# EAGLE board arduino boardv3 (EAGLE 6.1)
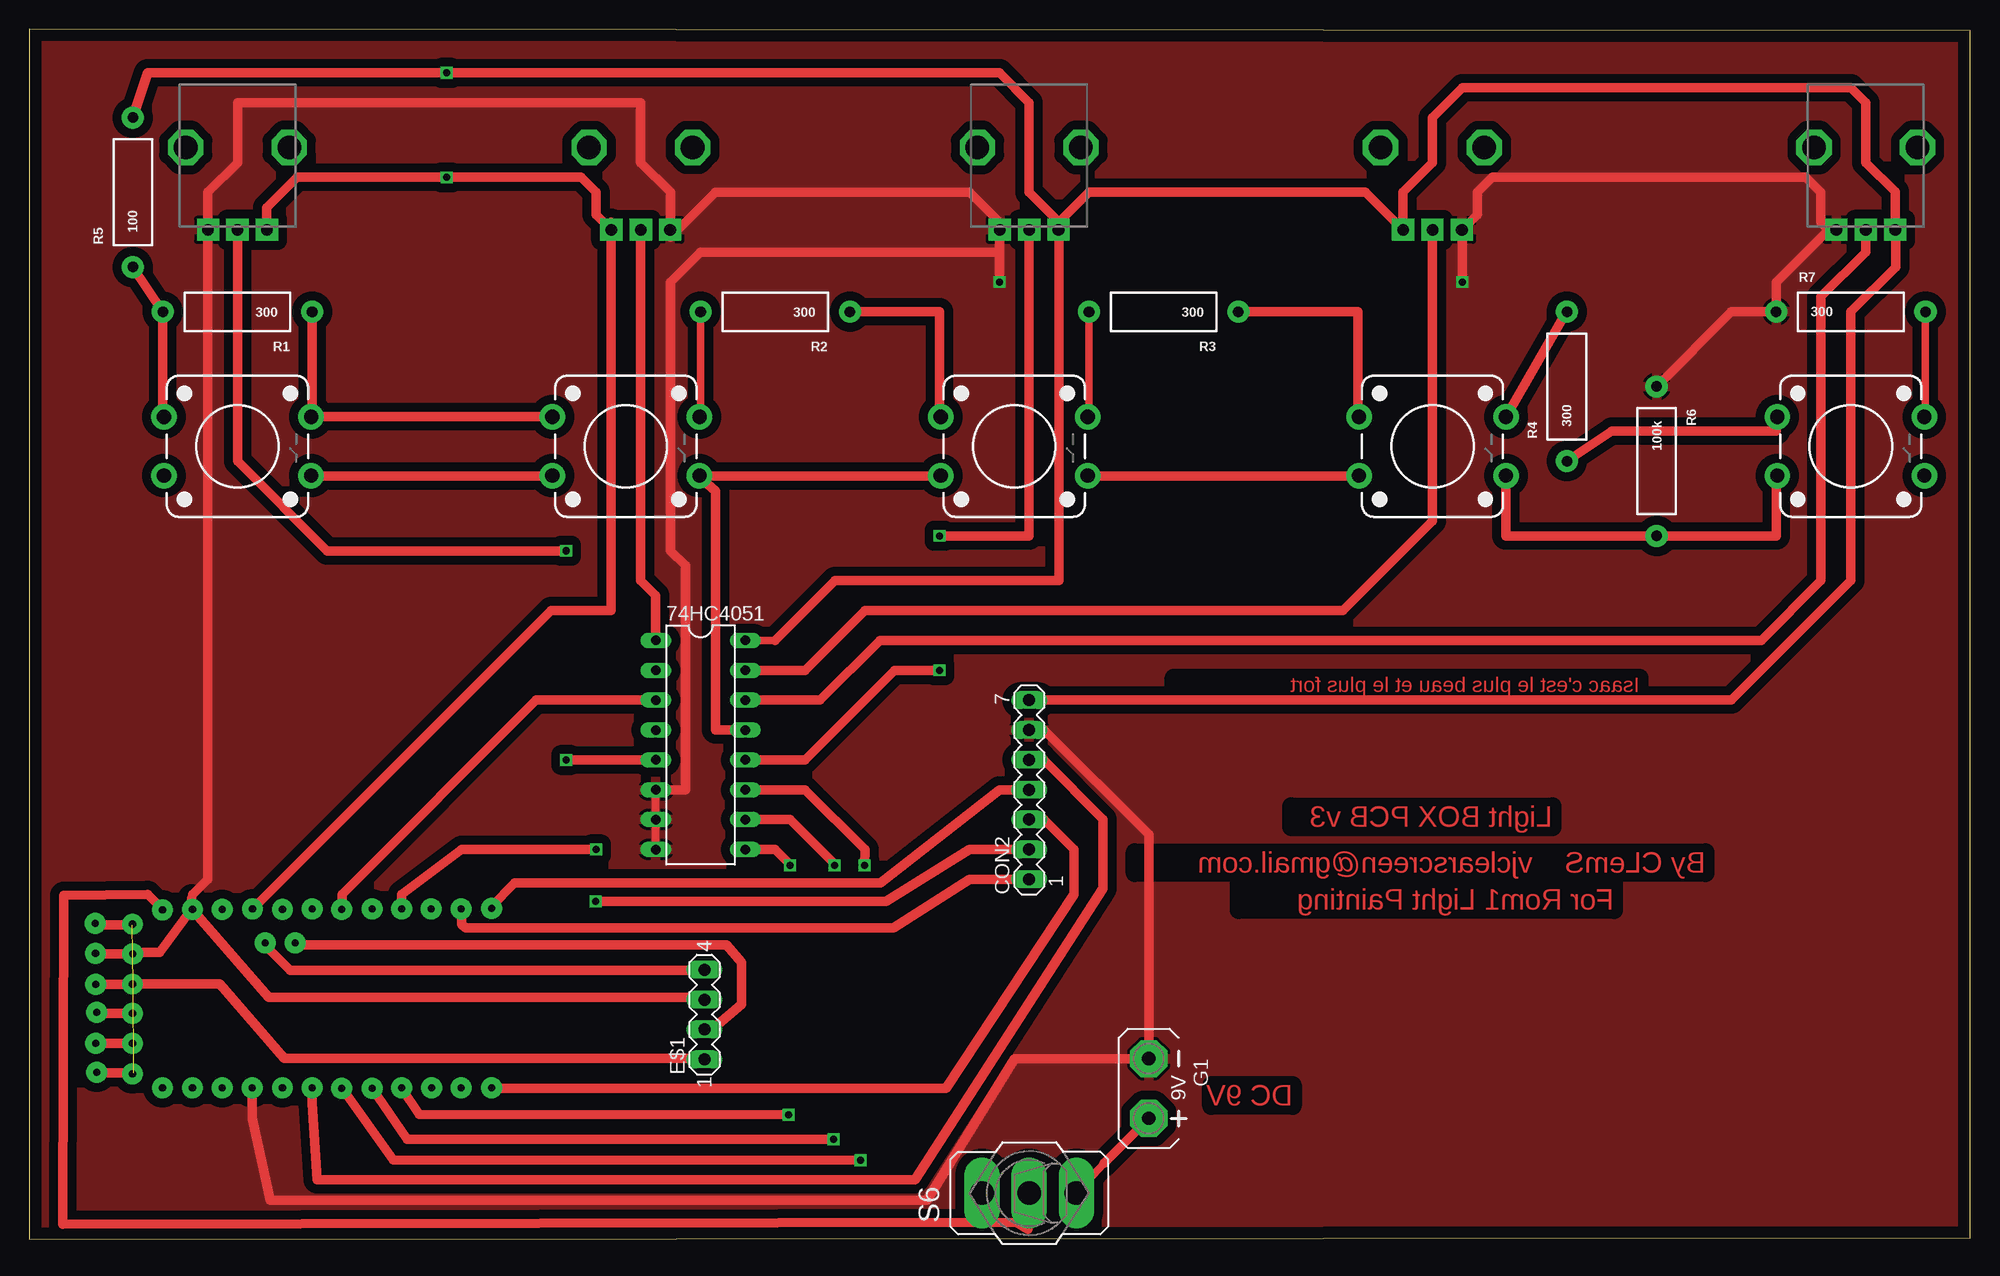
[diagram p0: board, top side]
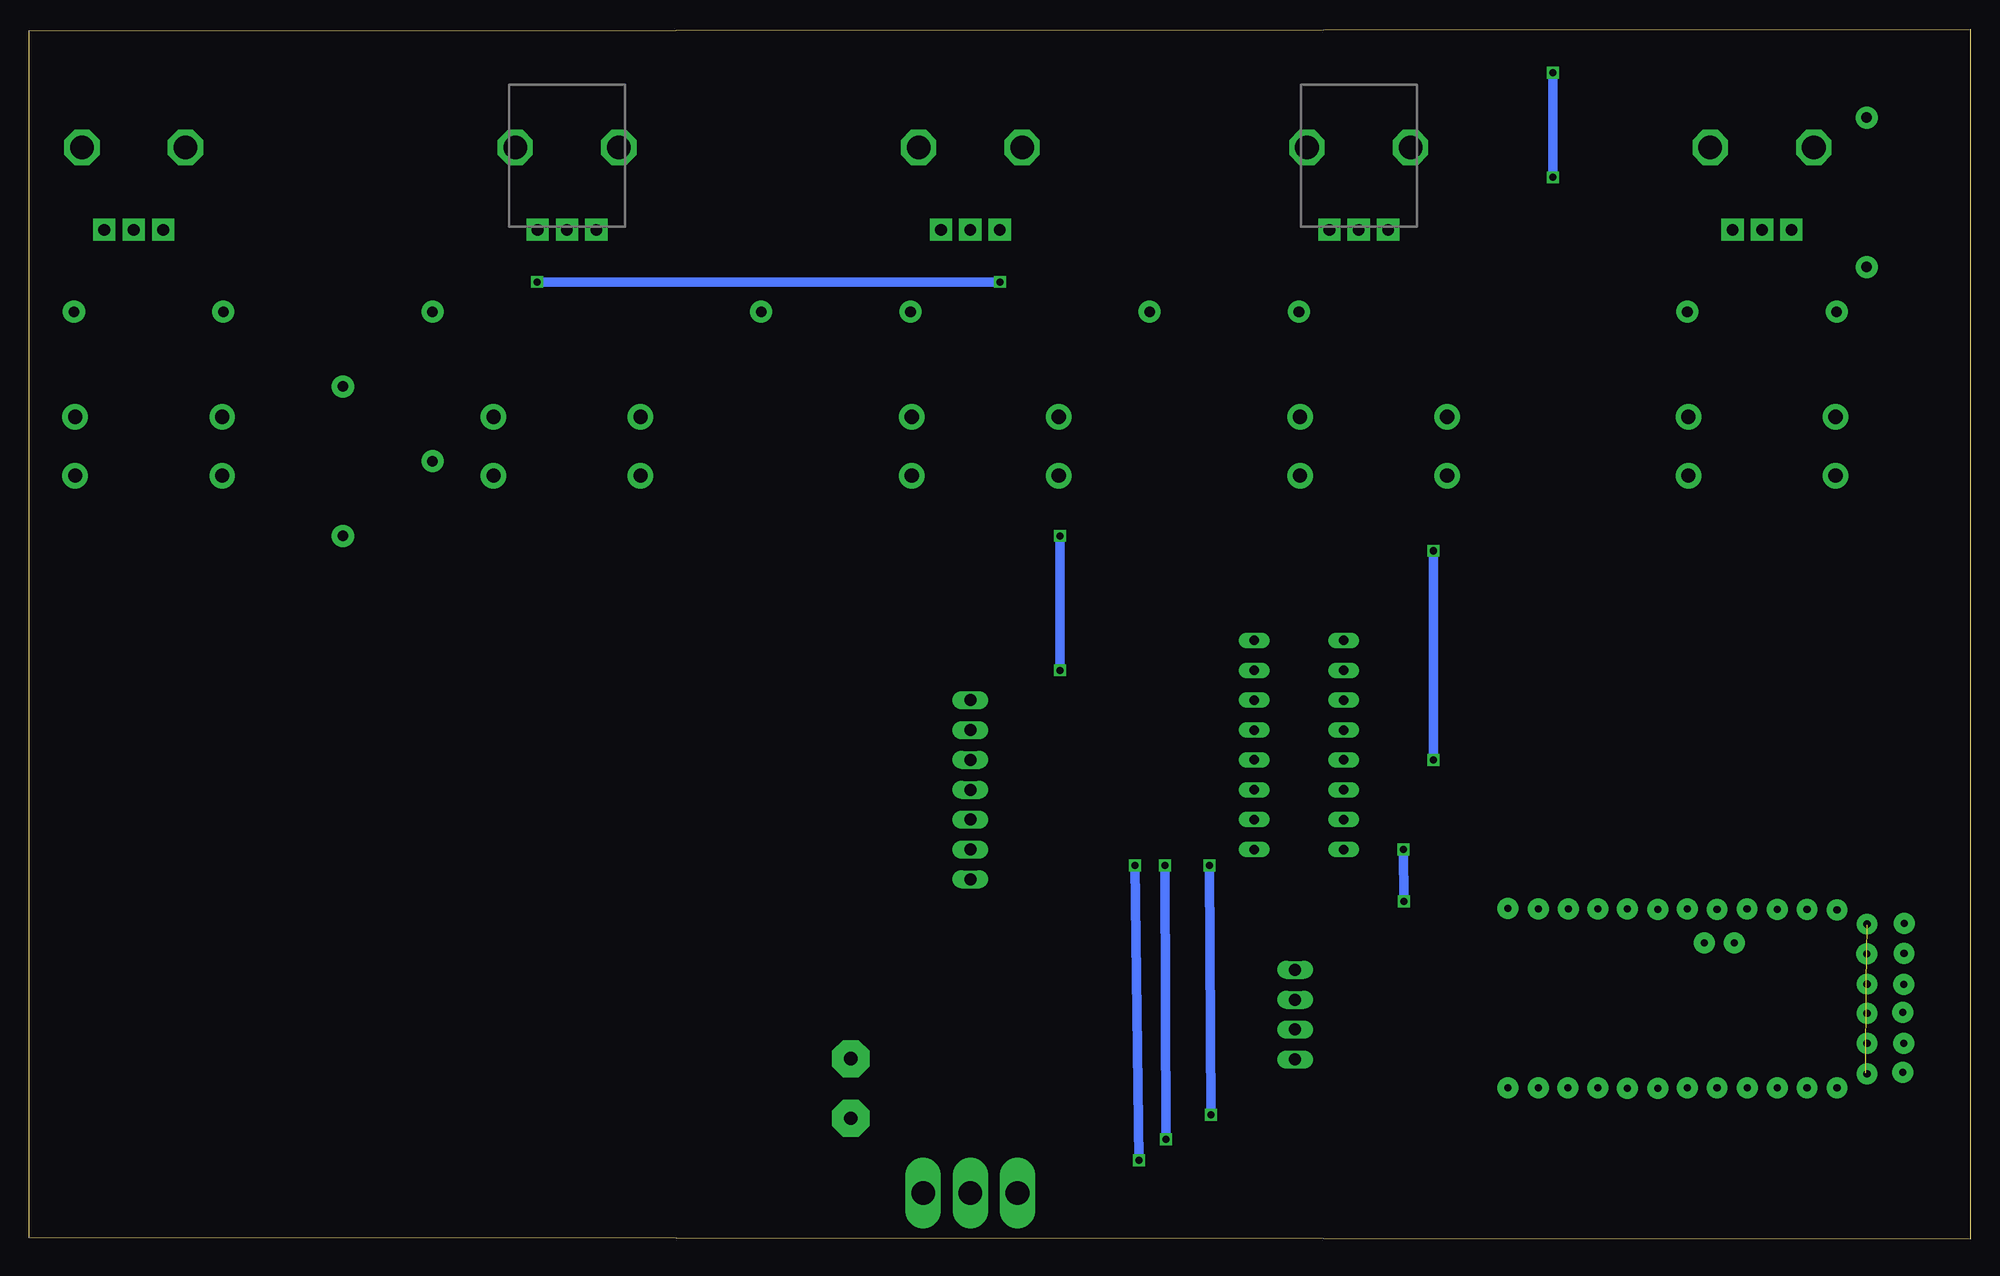
[diagram p1: board, bottom side, seen from below]

Size 164.99 x 102.86 mm. Coordinates in mm from the lower left corner, seen from the top.
Outline: 0,0 164.99,0.1 164.99,102.73 0,102.86 0,0
Copper layers (1*16): Top 0.035mm / dielectric 1.5mm / Bottom 0.035mm
Design rules: minimum track width 10mil, minimum drill 24mil, track to track 30mil, track to pad 30mil, pad to pad 30mil, via to via 30mil, smd to smd 8mil, copper to edge 40mil, drill to drill 30mil, minimum pad ring 10mil, minimum via ring 8mil, stop-mask expansion 4mil, vias tented up to drill 0mil, thermal gap 10mil

## Footprints (pad centres in the part's own frame; a part is rotated, then mirrored left to right if it is on the bottom)
DIL16 = drill 0.813 long: 1 -8.89,-3.81; 2 -6.35,-3.81; 3 -3.81,-3.81; 4 -1.27,-3.81; 5 1.27,-3.81; 6 3.81,-3.81; 7 6.35,-3.81; 8 8.89,-3.81; 9 8.89,3.81; 10 6.35,3.81; 11 3.81,3.81; 12 1.27,3.81; 13 -1.27,3.81; 14 -3.81,3.81; 15 -6.35,3.81; 16 -8.89,3.81
MA07-1 = drill 1.016 long: 1 -7.62,0; 2 -5.08,0; 3 -2.54,0; 4 0,0; 5 2.54,0; 6 5.08,0; 7 7.62,0
MA04-1 = drill 1.016 long: 1 -3.81,0; 2 -1.27,0; 3 1.27,0; 4 3.81,0
AB9V = drill 1.118 pad 3.15 octagon: + 0,2.54; - 0,-2.54
AXIAL-0.5 = drill 0.9 pad 1.88: P$1 -6.35,0; P$2 6.35,0
ALPS_POT = drill 1 pad 1.88 square: P$1 7,-2.5; P$2 7,0; P$3 7,2.5 | drill 2 octagon: P$4 0,-4.4; P$5 0,4.4
TACTILE-PTH-12MM = drill 1.2 pad 2.159: 1 6.25,-2.5; 2 -6.25,-2.5; 3 6.25,2.5; 4 -6.25,2.5
320-916 = drill 2.007 long: 1 0,4.013; 2 0,0; 3 0,-4.013

## Placement (x,y rotation side)
74HC4051  4051N  [DIL16]  57.06,42.01 270 top
CON2  CON2  [MA07-1]  85,38.2 90 top
E$1  [MA04-1]  57.39,19.09 90 top
G1  AB9V  [AB9V]  95.16,12.8 180 top
R1  300  [AXIAL-0.5]  17.69,78.84 180 top
R2  300  [AXIAL-0.5]  63.41,78.84 180 top
R3  300  [AXIAL-0.5]  96.43,78.84 180 top
R4  300  [AXIAL-0.5]  130.72,72.49 90 top
R5  100  [AXIAL-0.5]  8.8,89 90 top
R6  100k  [AXIAL-0.5]  138.34,66.14 270 top
R7  300  [AXIAL-0.5]  154.85,78.84 0 top
RV1  1k  [ALPS_POT]  17.69,92.81 270 top
RV2  1k  [ALPS_POT]  51.98,92.81 270 bottom
RV3  1k  [ALPS_POT]  85,92.81 270 top
RV4  1k  [ALPS_POT]  119.29,92.81 270 bottom
RV5  1k  [ALPS_POT]  156.12,92.81 270 top
S1  SWITCH-MOMENTARY-212MM  [TACTILE-PTH-12MM]  17.69,67.41 0 top
S2  SWITCH-MOMENTARY-212MM  [TACTILE-PTH-12MM]  50.71,67.41 0 top
S3  SWITCH-MOMENTARY-212MM  [TACTILE-PTH-12MM]  83.73,67.41 0 top
S4  SWITCH-MOMENTARY-212MM  [TACTILE-PTH-12MM]  119.29,67.41 0 top
S5  SWITCH-MOMENTARY-212MM  [TACTILE-PTH-12MM]  154.85,67.41 0 top
S6  ON/OFF  [320-916]  85,3.91 90 top

## Library data of the parts
74HC4051 = 40xx
CON2 = con-lstb; OC_FARNELL: unknown; OC_NEWARK: unknown
E$1 = con-lstb
G1 = battery
R1-R7 = SparkFun-Passives
RV1-RV5 = SparkFun-Electromechanical; PROD_ID: RES-09177
S1-S5 = SparkFun-Electromechanical; PROD_ID: SWCH-09185
S6 = switch

## Nets
A1: 74HC4051.3
D3_GSCLK: CON2.5
D4_A_S0: 74HC4051.11
D5_B_S1: 74HC4051.10
D6_C_S2: 74HC4051.9
D9_XLAT: CON2.3
D10_BLANK: CON2.4
D11_SIN: CON2.1
D13_SCLK: CON2.2
GND: 74HC4051.6 74HC4051.7 74HC4051.8 CON2.6 G1.- R6.P$1 R7.P$1 RV1.P$1 RV2.P$1 RV3.P$1 RV4.P$1 RV5.P$1
N$1: S6.2
N$2: R1.P$2 R5.P$1
N$3: R1.P$1
N$4: R2.P$1
N$5: R4.P$2 S4.3
N$6: R4.P$1
N$7: G1.+ S6.3
POT1: 74HC4051.5 RV1.P$2
POT2: 74HC4051.1 RV2.P$2
POT3: 74HC4051.12 RV3.P$2
POT4: 74HC4051.15 RV4.P$2
POT5: 74HC4051.14 RV5.P$2
S$2: 74HC4051.13 S2.1
S$6: R2.P$2 S2.3
S$7: S1.3
S$8: R3.P$1
S$9: R3.P$2 S3.3
S$10: R7.P$2 S5.3
S$11: S5.1
SWITCH_IN: R6.P$2 S4.1
VCC: 74HC4051.16 CON2.7 R5.P$2 RV1.P$3 RV2.P$3 RV3.P$3 RV4.P$3 RV5.P$3

## Tracks (layer width: path | path; a pad name or v marks a point on that pad's centre or on a via)
A1
  Top 0.813: 74HC4051.3 43.09,45.82 26.58,29.31 26.58,28.04
A4  (via drill 0.6 pad 1.78)
  other vias: 22.58,25.19
A5  (via drill 0.6 pad 1.78)
  other vias: 20.03,25.19
D3_GSCLK
  Top 0.635: 86.27,40.74 CON2.5
  Top 0.813: 86.27,40.74 91.29,35.66 91.29,29.81 75.28,5.04 24.48,5.04 24.04,11.53 24.04,12.8
D4_A_S0  (via drill 0.6)
  Top 0.813: 74HC4051.11 65.95,38.2 71.03,33.12 v70.99,31.76 | 26.58,12.8 30.92,6.73 v70.66,6.69
  Bottom 0.813: v70.99,31.76 v70.66,6.69
D5_B_S1  (via drill 0.6)
  Top 0.813: 74HC4051.10 64.68,35.66 68.49,31.85 v68.45,31.76 | 29.12,12.8 32.09,8.49 v68.37,8.49
  Bottom 0.813: v68.45,31.76 v68.37,8.49
D6_C_S2  (via drill 0.6)
  Top 0.813: 74HC4051.9 63.41,33.12 64.68,31.85 v64.68,31.76 | 31.66,12.8 33.14,10.6 v64.53,10.57
  Bottom 0.813: v64.68,31.76 v64.53,10.57
D9_XLAT
  Top 0.635: 86.27,35.66 CON2.3
  Top 0.813: 86.27,35.66 88.81,33.12 88.81,29.31 77.93,12.83 39.28,12.8
D10_BLANK
  Top 0.813: 39.24,28.25 41.26,30.27 41.68,30.27 72.38,30.27 82.46,38.2 CON2.4
D11_SIN
  Top 0.813: CON2.1 79.92,30.58 73.47,26.45 37.08,26.46 36.74,26.77 36.74,28.04
D13_SCLK  (via drill 0.6)
  Top 0.813: CON2.2 79.92,33.12 72.82,28.7 v48.13,28.7 | v48.17,33.12 36.74,33.12 31.66,29.31 31.66,28.04
  Bottom 0.813: v48.17,33.12 v48.13,28.7
GND  (via drill 0.6)
  Top 0.635: 74HC4051.8 74HC4051.7 74HC4051.6 | 82.46,86.46 RV3.P$1 | 54.52,86.46 RV2.P$1 | 86.27,43.28 CON2.6
  Top 0.813: RV1.P$1 15.15,85.85 | 15.15,85.85 15.15,89 17.69,91.54 17.69,96.62 51.98,96.62 51.98,91.54 54.52,89 54.52,86.46 54.52,85.19 58.33,89 79.92,89 82.46,86.46 82.46,83.92 | 152.96,85.81 152.31,86.46 152.31,89 151.04,90.27 124.37,90.27 123.1,89 123.1,87.12 RV4.P$1 121.83,85.77 v121.83,81.38 | 152.96,85.81 RV5.P$1 | 152.96,85.81 148.5,81.35 R7.P$1 144.69,78.84 R6.P$1 | 82.46,83.92 v82.46,81.38 | 74HC4051.6 55.79,38.2 55.79,57.25 54.52,58.52 54.52,81.38 57.06,83.92 82.46,83.92 | 15.15,85.85 15.15,30.58 13.88,29.31 | 86.27,43.28 95.16,34.39 G1.- 83.73,15.34 76.33,3.28 20.45,3.28 18.96,10.26 18.96,12.8
  Bottom 0.813: v121.83,81.38 v82.46,81.38
  pour Top: -0.18,100.16 -0.18,-0.52 165.4,-0.52 165.4,100.17 164.61,103.36 -0.96,103.36 0.22,100.16
N$1
  Top 0.813: 11.34,28.04 10.07,29.31 2.93,29.21 2.83,1.27 83.92,1.44 84.89,0.82 S6.2
N$2
  Top 0.813: R5.P$1 R1.P$2 11.34,69.95
N$3
  Top 0.813: 44.36,69.95 24.04,69.95 R1.P$1
N$4
  Top 0.635: 73.57,78.84 R2.P$1
  Top 0.813: 77.38,69.95 77.38,78.84 R2.P$1
N$5
  Top 0.813: S4.3 130.72,78.9 R4.P$2
N$6
  Top 0.813: 148.5,69.95 148.5,68.68 134.53,68.68 R4.P$1
N$7
  Top 0.635: 91.35,6.45 S6.3
  Top 0.813: G1.+ 91.35,6.45
POT1  (via drill 0.6)
  Top 0.813: 74HC4051.5 v45.63,40.74 | RV1.P$2 17.69,66.14 25.31,58.52 v45.63,58.52
  Bottom 0.813: v45.63,58.52 v45.63,40.74
POT2
  Top 0.813: RV2.P$2 51.98,55.98 53.25,54.71 74HC4051.1
POT3  (via drill 0.6)
  Top 0.813: RV3.P$2 85,59.79 v77.38,59.79 | 74HC4051.12 65.95,40.74 73.57,48.36 v77.38,48.36
  Bottom 0.813: v77.38,59.79 v77.38,48.36
POT4
  Top 0.813: 74HC4051.15 65.95,48.36 71.03,53.44 111.67,53.44 119.29,61.06 RV4.P$2
POT5
  Top 0.813: RV5.P$2 156.12,83.92 152.31,80.11 152.31,55.98 147.23,50.9 72.3,50.9 67.22,45.82 74HC4051.14
S$1  (via drill 0.6 pad 1.78)
  other vias: 39.29,28.11
S$2
  Top 0.813: 74HC4051.13 58.33,43.28 58.33,63.6 56.96,64.77 S2.1
S$3
  Top 0.813: 24.04,64.87 44.36,64.87
S$4
  Top 0.813: 57.06,64.87 77.38,64.87
S$5
  Top 0.813: 90.08,64.87 112.94,64.87
S$6
  Top 0.635: S2.3 57.06,69.95 R2.P$2
S$7
  Top 0.635: 24.04,69.95 S1.3
S$8
  Top 0.813: R3.P$1 112.94,78.84 112.94,69.95
S$9
  Top 0.635: R3.P$2 90.08,69.95 S3.3
S$10
  Top 0.635: R7.P$2 161.2,69.95 S5.3
S$11
  Top 0.635: 161.2,64.87 S5.1
S$12  (via drill 0.6 pad 1.78)
  other vias: 36.7,28.07
S$13  (via drill 0.6 pad 1.78)
  other vias: 34.15,28.07
S$14  (via drill 0.6 pad 1.78)
  other vias: 31.64,28.07
S$15  (via drill 0.6 pad 1.78)
  other vias: 29.12,28.07
S$16  (via drill 0.6 pad 1.78)
  other vias: 26.54,28.04
S$17  (via drill 0.6 pad 1.78)
  other vias: 24.03,28.07
S$18  (via drill 0.6 pad 1.78)
  other vias: 21.51,28.04
S$19  (via drill 0.6 pad 1.78)
  other vias: 18.96,28.07
S$20  (via drill 0.6 pad 1.78)
  other vias: 16.38,28.04
S$21  (via drill 0.6 pad 1.78)
  other vias: 13.86,28.04
S$22  (via drill 0.6 pad 1.78)
  other vias: 11.31,28
S$23  (via drill 0.6 pad 1.78)
  other vias: 8.76,26.78
S$24  (via drill 0.6 pad 1.78)
  other vias: 8.8,24.27
S$25  (via drill 0.6 pad 1.78)
  other vias: 8.76,21.68
S$26  (via drill 0.6 pad 1.78)
  other vias: 8.76,19.2
S$27  (via drill 0.6 pad 1.78)
  other vias: 8.76,16.65
S$28  (via drill 0.6 pad 1.78)
  other vias: 8.76,14.07
S$29  (via drill 0.6 pad 1.78)
  other vias: 11.31,12.85
S$30  (via drill 0.6 pad 1.78)
  other vias: 13.86,12.85
S$31  (via drill 0.6 pad 1.78)
  other vias: 16.38,12.85
S$32  (via drill 0.6 pad 1.78)
  other vias: 18.93,12.85
S$33  (via drill 0.6 pad 1.78)
  other vias: 21.51,12.85
S$34  (via drill 0.6 pad 1.78)
  other vias: 24.03,12.85
S$35  (via drill 0.6 pad 1.78)
  other vias: 26.54,12.81
S$36  (via drill 0.6 pad 1.78)
  other vias: 29.12,12.81
S$37  (via drill 0.6 pad 1.78)
  other vias: 31.64,12.85
S$38  (via drill 0.6 pad 1.78)
  other vias: 34.19,12.85
S$39  (via drill 0.6 pad 1.78)
  other vias: 36.7,12.85
S$40  (via drill 0.6 pad 1.78)
  other vias: 39.29,12.85
S$41
  Top 0.813: 20.02,25 22.16,22.85 57.47,22.85
S$42
  Top 0.813: 22.93,25.01 59.25,25.01 60.55,23.51 60.55,19.95 58.26,18 57.31,17.95 57.27,17.91
S$43  (5 unrouted)
  Top 0.813: 8.75,26.72 5.65,26.72 5.65,26.76 | 8.79,24.27 5.69,24.27 | 8.82,21.66 5.73,21.66 | 8.82,19.21 5.73,19.21 | 8.86,16.64 5.77,16.64 | 8.86,14.12 5.77,14.12
S$44  (via drill 0.6 pad 1.78)
  other vias: 5.73,14.19
S$45  (via drill 0.6 pad 1.78)
  other vias: 5.66,16.64
S$46  (via drill 0.6 pad 1.78)
  other vias: 5.73,19.29
S$47  (via drill 0.6 pad 1.78)
  other vias: 5.66,21.66
S$48  (via drill 0.6 pad 1.78)
  other vias: 5.62,24.31
S$49  (via drill 0.6 pad 1.78)
  other vias: 5.58,26.83
S$51
  Top 0.813: 8.67,21.72 16.16,21.72 21.65,15.38 57.45,15.38
S$52
  Top 0.813: 13.81,29.01 13.81,28.06 20.35,20.57 57.1,20.57 57.4,20.27
S$53
  Top 0.813: 13.82,28.12 11.06,24.38 8.78,24.36
S$54
  Top 0.813: 22.45,25.51 22.45,25.31 22.7,25.06
SWITCH_IN
  Top 0.813: S4.1 125.54,59.79 R6.P$2 148.5,59.79 148.5,64.87
VCC  (via drill 0.6)
  Top 0.635: 63.41,50.9 74HC4051.16 | 49.44,85.19 RV2.P$3 | 158.66,85.19 158.66,86.46 RV5.P$3
  Top 0.813: RV2.P$3 48.17,87.12 48.17,89 46.9,90.27 v35.47,90.27 22.77,90.27 20.19,87.69 RV1.P$3 | 87.54,86.46 90.08,89 113.6,89 RV4.P$3 116.75,85.85 116.75,89 119.29,91.54 119.29,95.35 121.83,97.89 154.85,97.89 156.12,96.62 156.12,91.54 158.62,89.04 RV5.P$3 | 87.54,86.46 87.5,86.42 RV3.P$3 87.5,86.5 85,89 85,96.62 82.46,99.16 v35.47,99.16 10.07,99.16 R5.P$2 | 18.96,28.04 44.36,53.44 49.44,53.44 49.44,85.19 49.44,86.46 | 158.66,85.19 158.66,82.65 154.85,78.84 154.85,55.98 144.69,45.82 CON2.7 | 63.41,50.9 68.49,55.98 87.54,55.98 87.54,86.46
  Bottom 0.813: v35.47,99.16 v35.47,90.27

## Text on the board
Top: Isaac c'est le plus beau et le plus fort | Light BOX PCB v3 | By CLemS vjclearscreen@gmail.com | For Rom1 Light Painting | DC 9V